# Altium PCB Arm.PcbDoc (part 2 of 2)
Units mil, origin at the board's own origin, x right, y up, seen from the top; angles counter-clockwise.
Board outline 3959.08 x 4177.68 mil, 4 copper layers (Top Layer, Ground, Power, Bottom Layer), stack 58.661 mil thick; 200 components, 119 nets, 620 pads, 0 vias.
Unrouted connection lines stored in the file: 405.
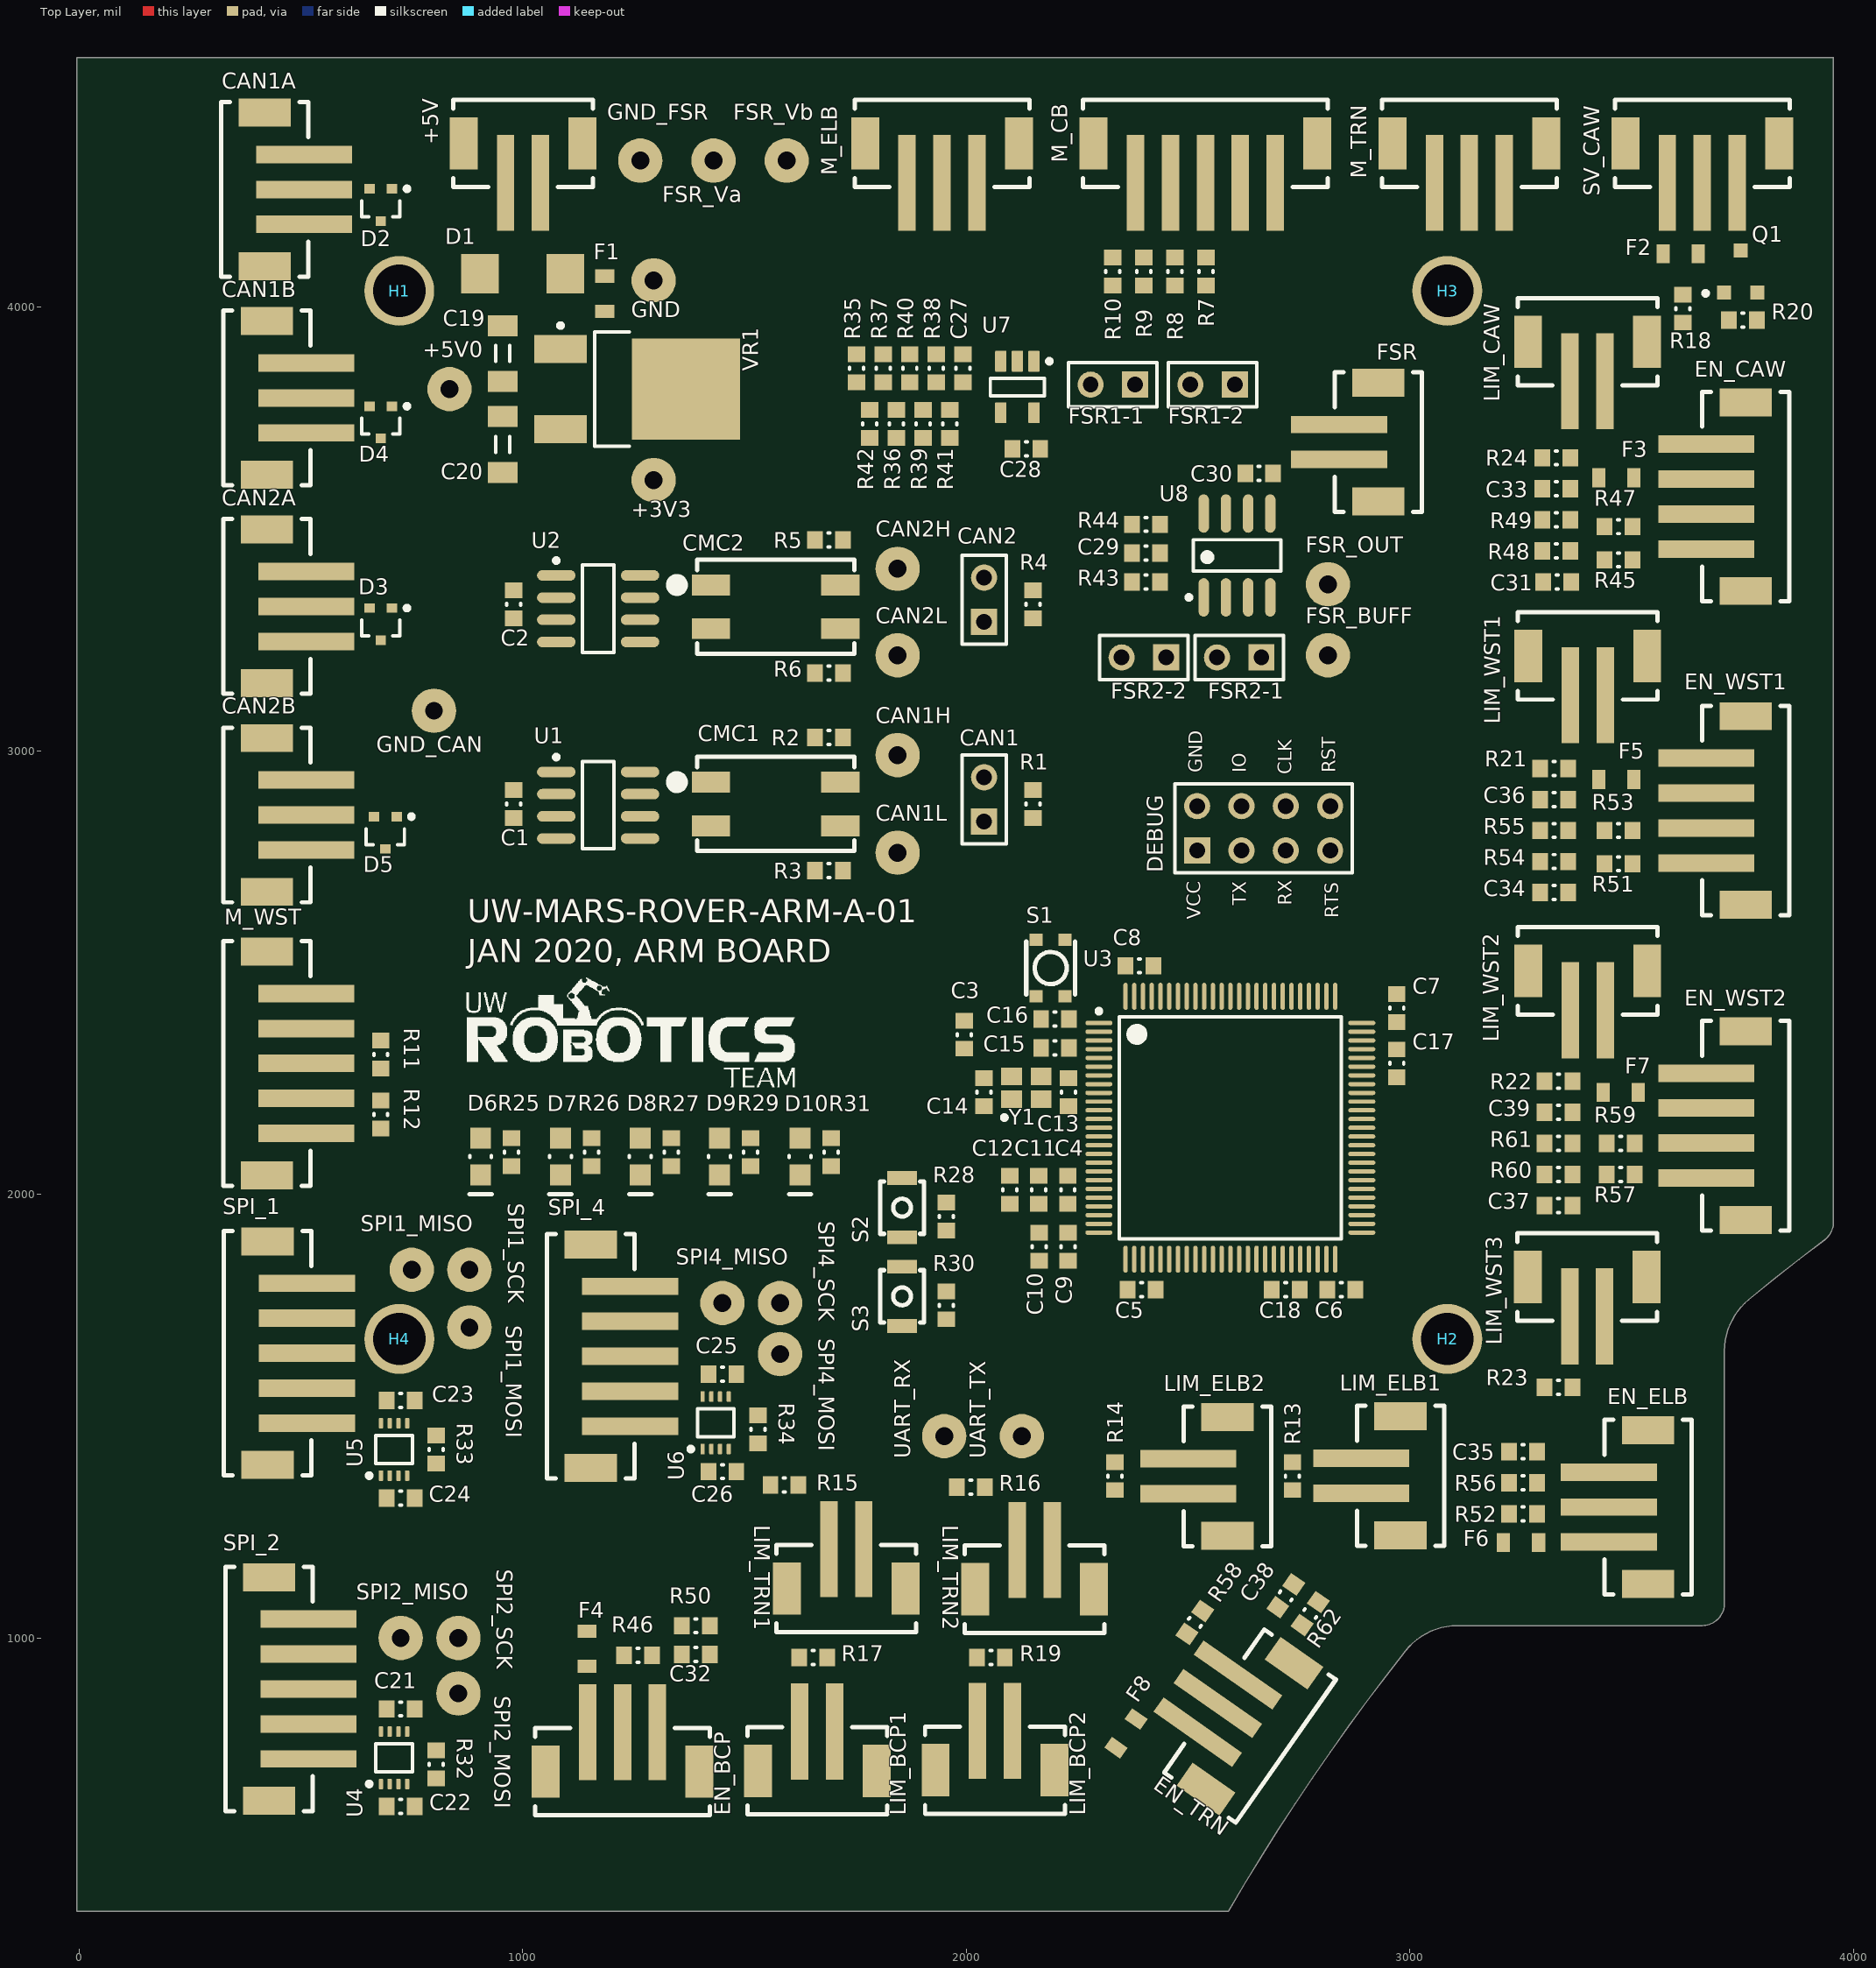
[diagram p0: Top Layer view]

## Polygon pours and split planes (outlines as drawn) (continued)
no net on Power (split plane): 3934.22,1937.44 3934.27,1936.93 3933.94,1932.71 3932.83,1928.09 3931.01,1923.7 3928.53,1919.66 3925.45,1916.05 3922.26,1913.33 3922.28,1913.3 3907.47,1902.17 3857.21,1863.45 3807.44,1824.11 3758.15,1784.16 3750.51,1777.82 3750.54,1777.78 3750.53,1777.78 3749.9,1778.55 3749.34,1778.32 3750.12,1777.43 3746.49,1774.46 3738.38,1766.86 3730.78,1758.75 3723.73,1750.16 3717.26,1741.13 3711.39,1731.69 3706.15,1721.89 3701.57,1711.77 3697.65,1701.37 3694.43,1690.73 3691.9,1679.91 3690.09,1668.94 3689,1657.88 3688.64,1646.87 3688.63,1646.78 3688.63,1078.14 3688.68,1077.63 3688.35,1073.41 3687.24,1068.79 3685.43,1064.4 3682.95,1060.36 3679.86,1056.75 3676.25,1053.66 3672.2,1051.18 3667.82,1049.36 3663.2,1048.26 3658.97,1047.92 3658.47,1047.97 3107.21,1047.97 3107.12,1047.96 3096.1,1047.6 3085.04,1046.51 3074.08,1044.7 3063.26,1042.18 3052.62,1038.95 3042.22,1035.04 3032.1,1030.45 3022.3,1025.22 3012.86,1019.35 3003.83,1012.87 2995.24,1005.82 2987.13,998.23 2979.53,990.12 2973.75,983.08 2973.78,983.06 2973.77,983.05 2973.1,983.58 2972.87,983.05 2973.43,982.63 2973.36,982.55 2972.79,981.86 2972.79,981.85 2972.75,981.77 2962.24,968.47 2923.51,918.22 2885.41,867.5 2847.93,816.31 2811.08,764.66 2774.87,712.57 2739.3,660.04 2704.38,607.07 2670.11,553.68 2636.49,499.87 2603.54,445.66 2579.12,404.33 15.33,404.33 15.33,4541.82 3934.22,4541.82

## Silkscreen, mask and mechanical layers (free items; w line width, h text height)
Top Overlay:
  drawing of 16 lines, arcs and shapes, not listed
  text "UW-MARS-ROVER-ARM-A-01 / JAN 2020, ARM BOARD" at 875,2505 h90
Mechanical 1:
  circle w0.5: c3083.84,4036.24 r64.25
  circle w0.5: c3083.84,1674.04 r64.25
  circle w0.5: c721.76,1674.04 r64.25
  circle w0.5: c721.64,4036.24 r64.25
  circle w0.25: c3083.84,4036.24 r0.12
  circle w0.25: c3083.84,1674.04 r0.12
  circle w0.25: c2868.36,3610.96 r0.12
  circle w0.25: c721.64,4036.24 r0.12
  lines w0.5: -4.5,384.5 -4.5,4561.66 ; -4.5,384.5 2590.41,384.5 ; -4.5,384.5 -4.5,4561.66 ; -4.5,384.5 2590.41,384.5 ; -4.5,4561.66 3954.05,4561.66 ; -4.5,4561.66 3954.05,4561.66 ; 2590.41,384.5 cw(c7037.86,-2212.17) 2989.29,970.85 ; 2590.41,384.5 cw(c7037.86,-2212.17) 2989.29,970.85 ; 2989.29,970.85 cw(c3107.21,878.14) 3107.21,1028.14 ; 2989.29,970.85 cw(c3107.21,878.14) 3107.21,1028.14 ; 3107.21,1028.14 3658.47,1028.14 ; 3107.21,1028.14 3658.47,1028.14 ; 3658.47,1028.14 ccw(c3658.47,1078.14) 3708.47,1078.14 ; 3658.47,1028.14 ccw(c3658.47,1078.14) 3708.47,1078.14 ; 3708.47,1078.14 3708.47,1646.78 ; 3708.47,1078.14 3708.47,1646.78 ; 3708.47,1646.78 cw(c3858.47,1646.78) 3763.08,1762.55 ; 3708.47,1646.78 cw(c3858.47,1646.78) 3763.08,1762.55 ; 3763.08,1762.55 cw(c7037.86,-2212.17) 3934.19,1897.54 ; 3763.08,1762.55 cw(c7037.86,-2212.17) 3934.19,1897.54 ; 3934.19,1897.54 ccw(c3904.05,1937.44) 3954.05,1937.44 ; 3934.19,1897.54 ccw(c3904.05,1937.44) 3954.05,1937.44 ; 3954.05,1937.44 3954.05,4561.66 ; 3954.05,1937.44 3954.05,4387.83 3954.05,4561.66

## Text inside footprints (layer, text, board x,y; h text height)
DEBUG: Top Overlay "GND" at 2531.81,2950.04 h30 r90; Top Overlay "VCC" at 2527.87,2619.33 h30 r90; Top Overlay "RST" at 2831.81,2950.04 h30 r90; Top Overlay "CLK" at 2732.6,2946.1 h30 r90; Top Overlay "IO" at 2630.24,2950.04 h30 r90; Top Overlay "RTS" at 2838.9,2622.28 h30 r90; Top Overlay "RX" at 2732.6,2650.91 h30 r90; Top Overlay "TX" at 2630.24,2650.91 h30 r90